# Altium PCB opo_v4.PcbDoc (part 1 of 2)
Units mil, origin at the board's own origin, x right, y up, seen from the top; angles counter-clockwise.
Board outline 1250 x 1250 mil, 6 copper layers (Top Layer, GND, Mid-Layer 3, Mid-Layer 4, VCC, Bottom Layer), stack 72.01 mil thick; 106 components, 83 nets, 447 pads, 226 vias.
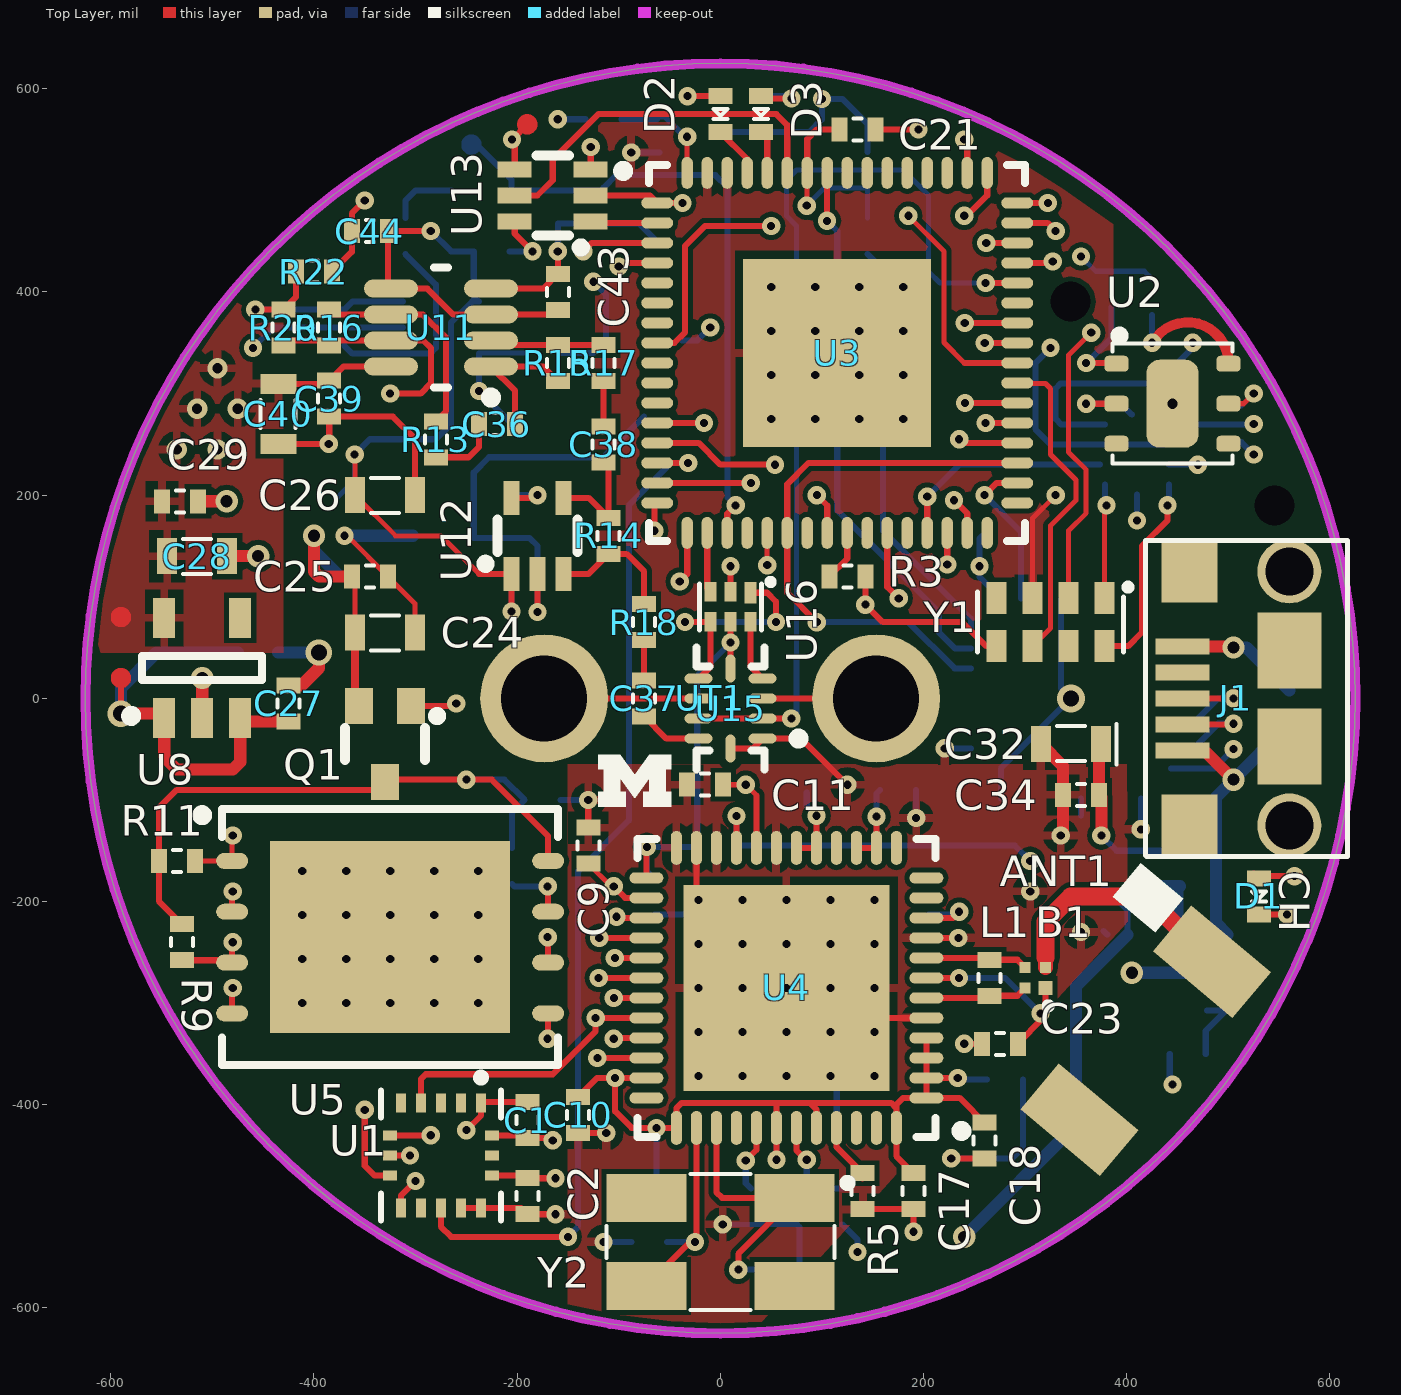
[diagram p0: Top Layer view]
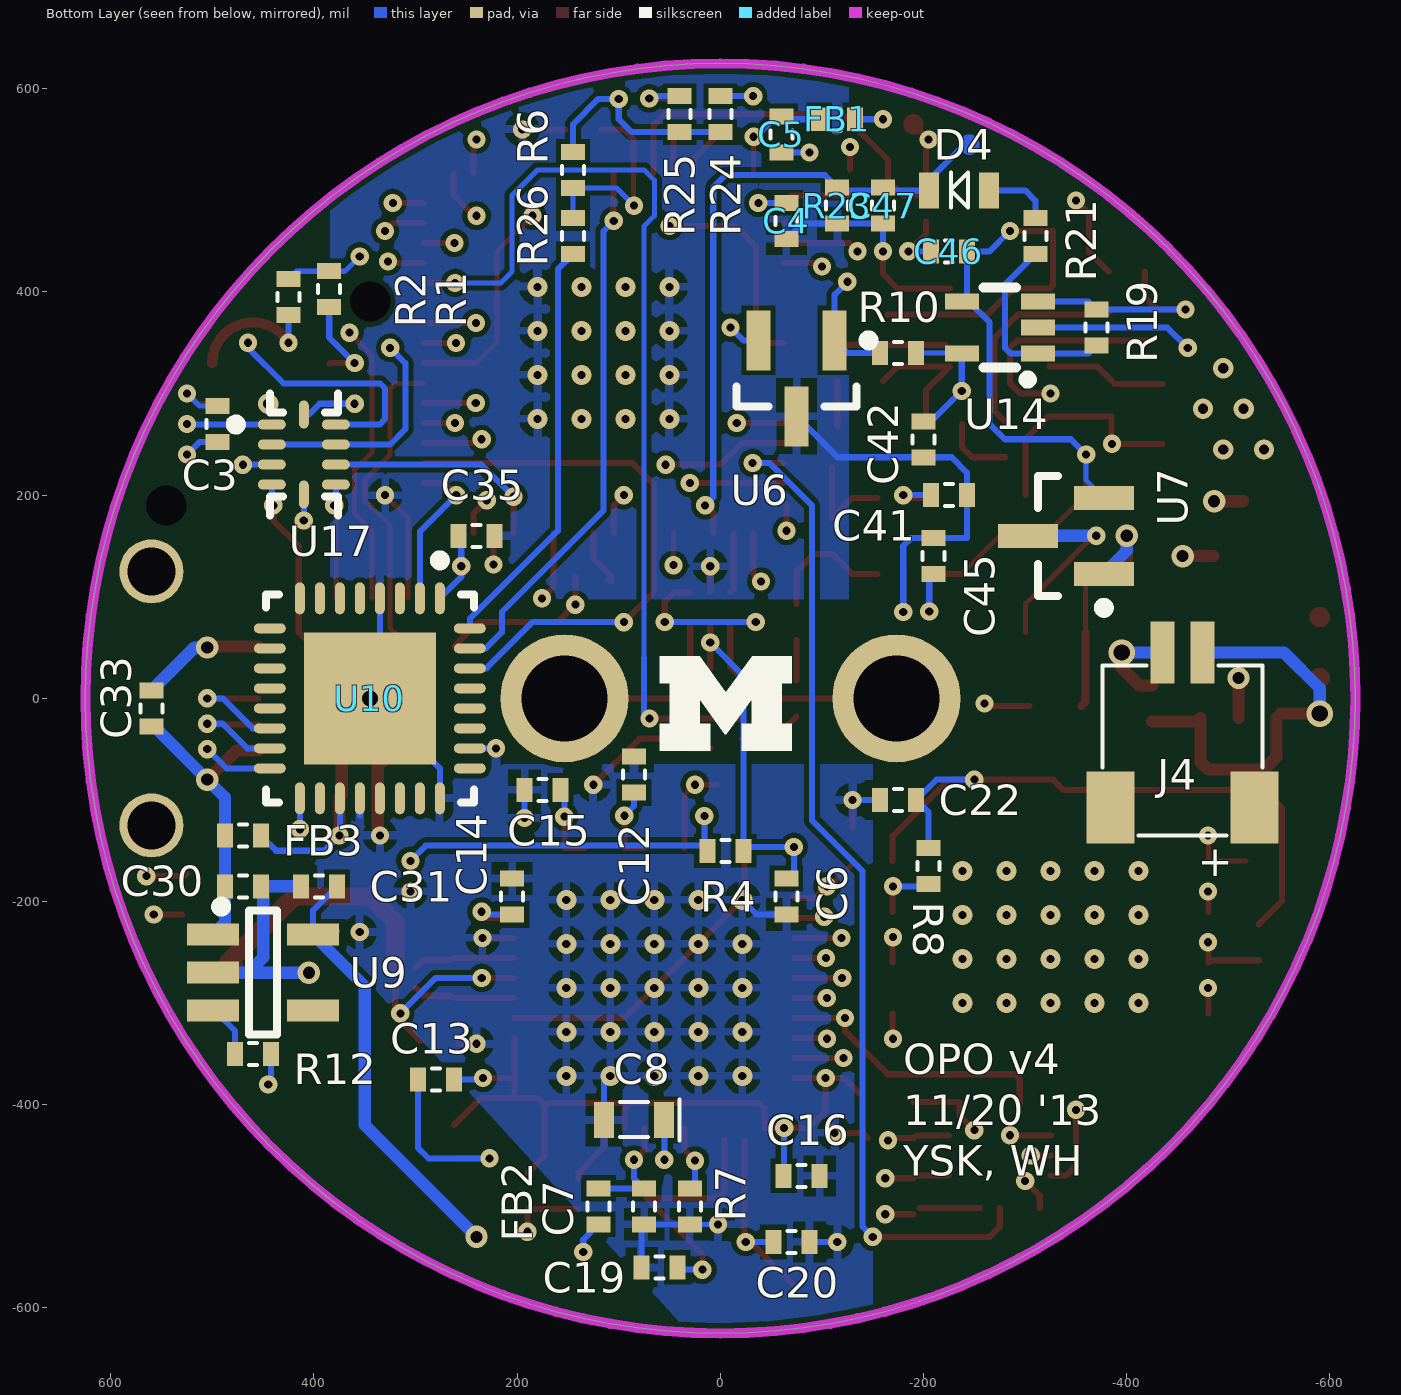
[diagram p1: Bottom Layer view, seen from below]
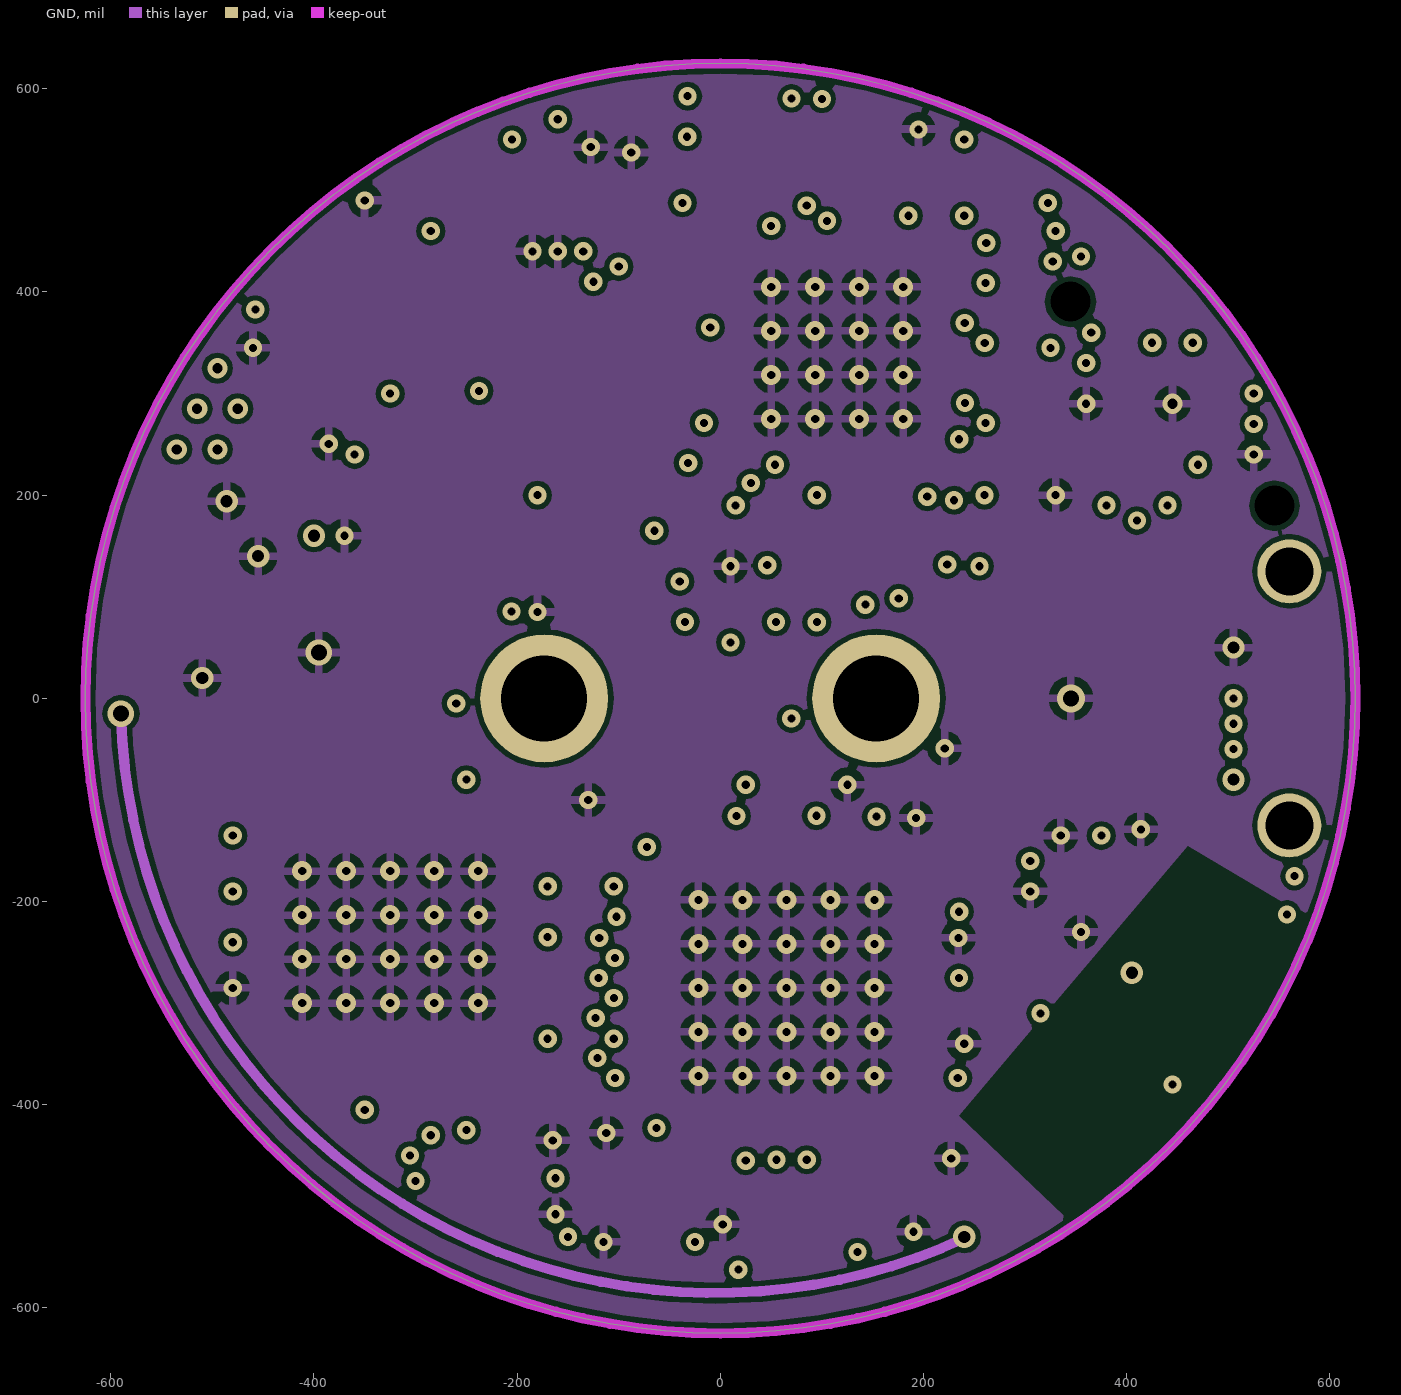
[diagram p2: GND]
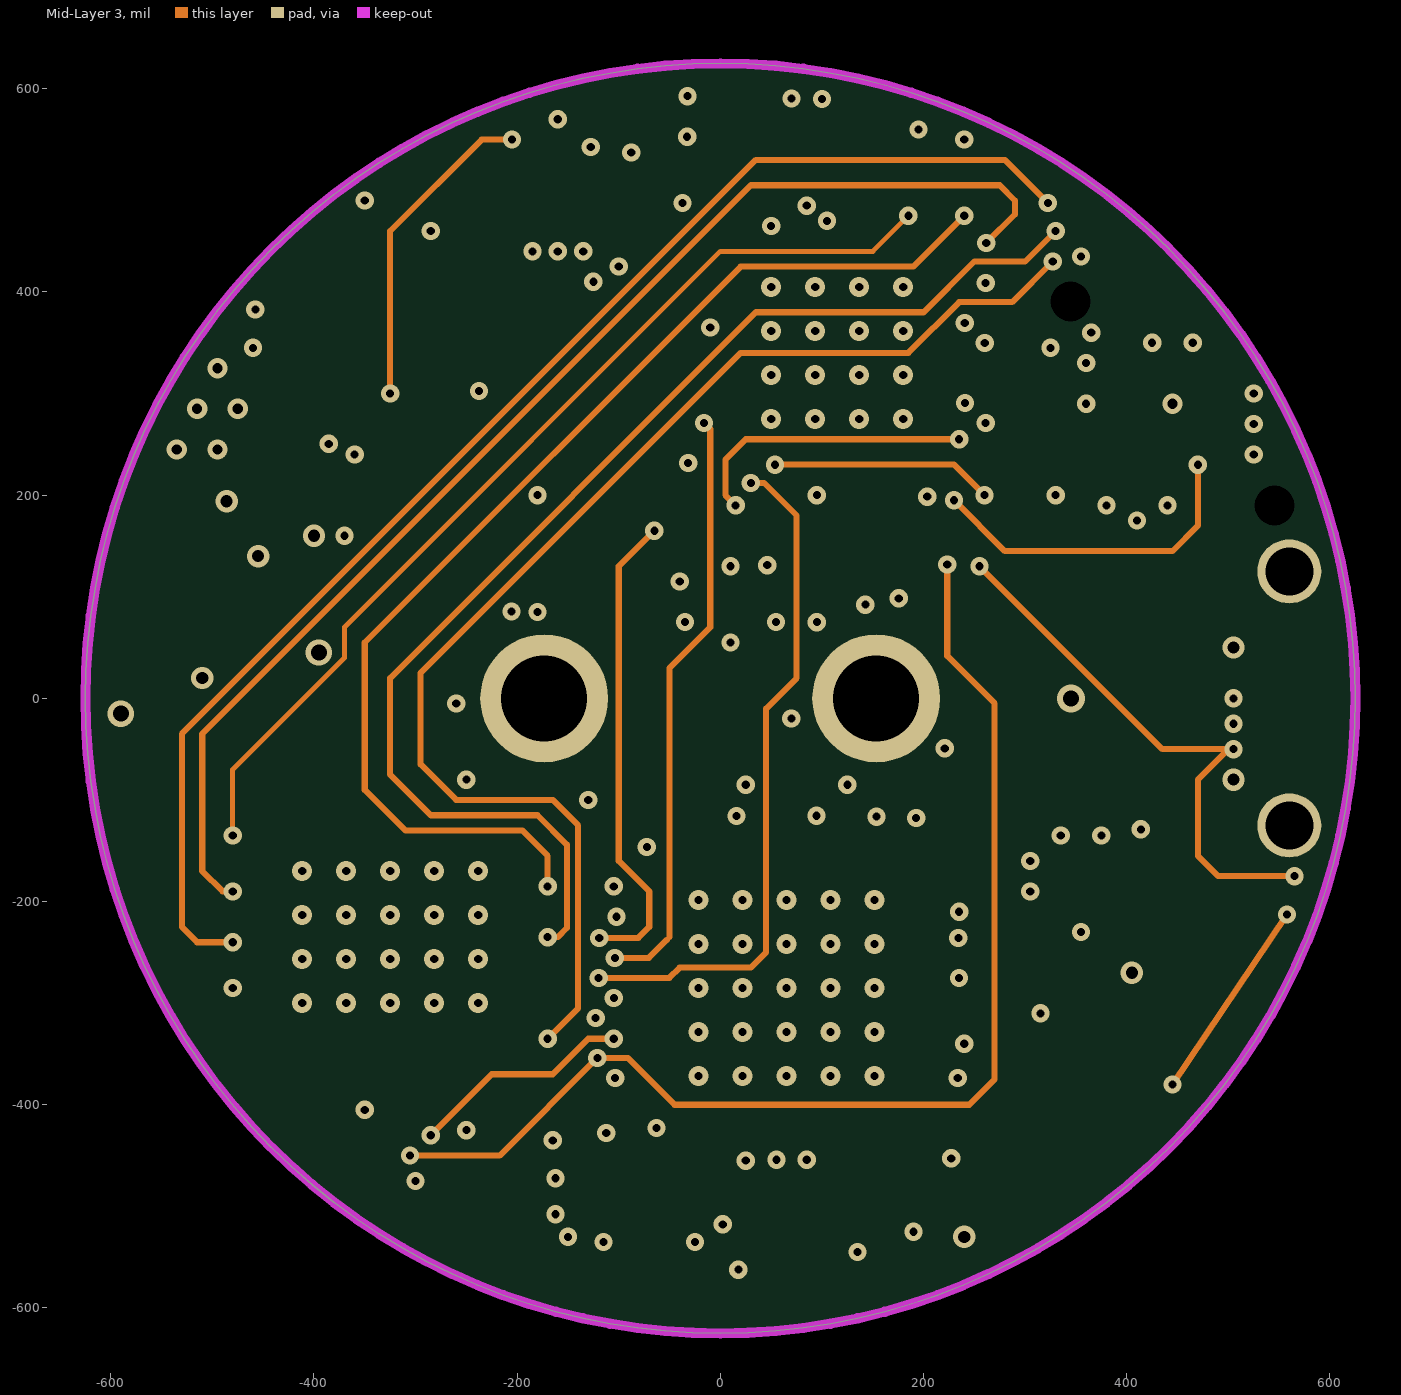
[diagram p3: Mid-Layer 3]
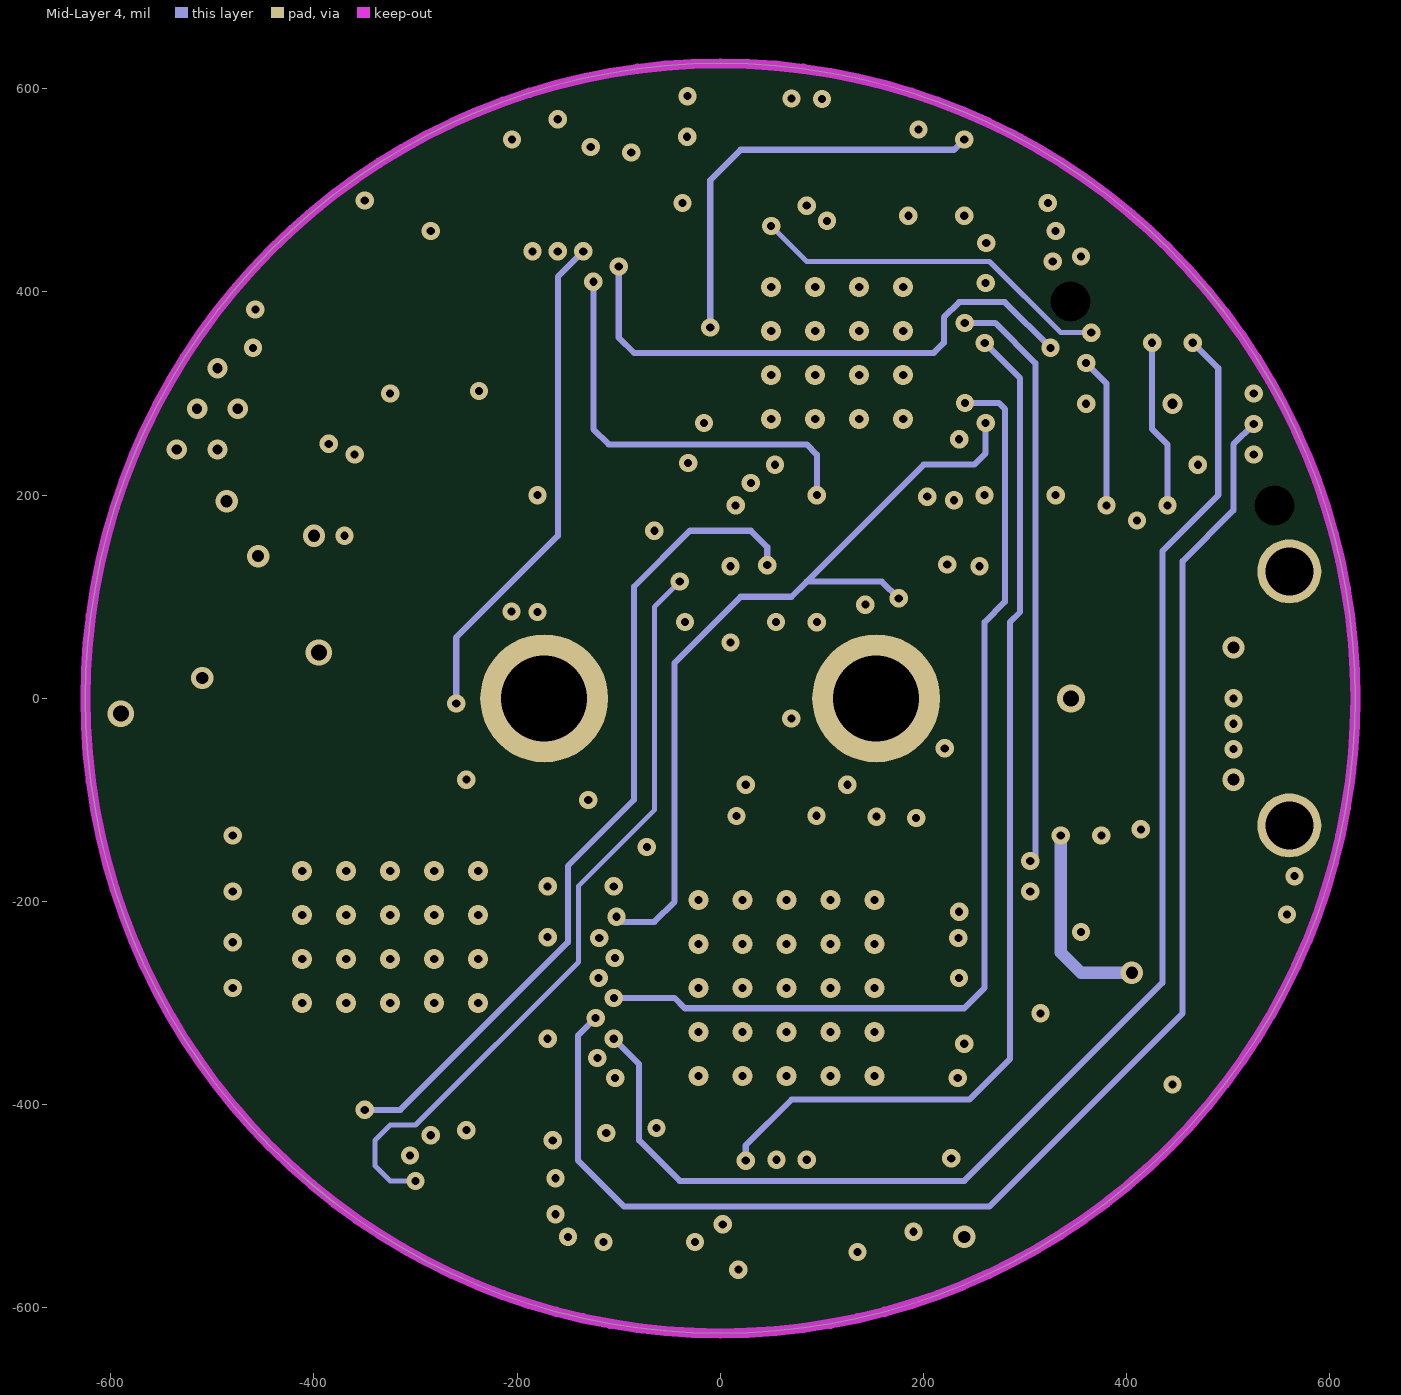
[diagram p4: Mid-Layer 4]
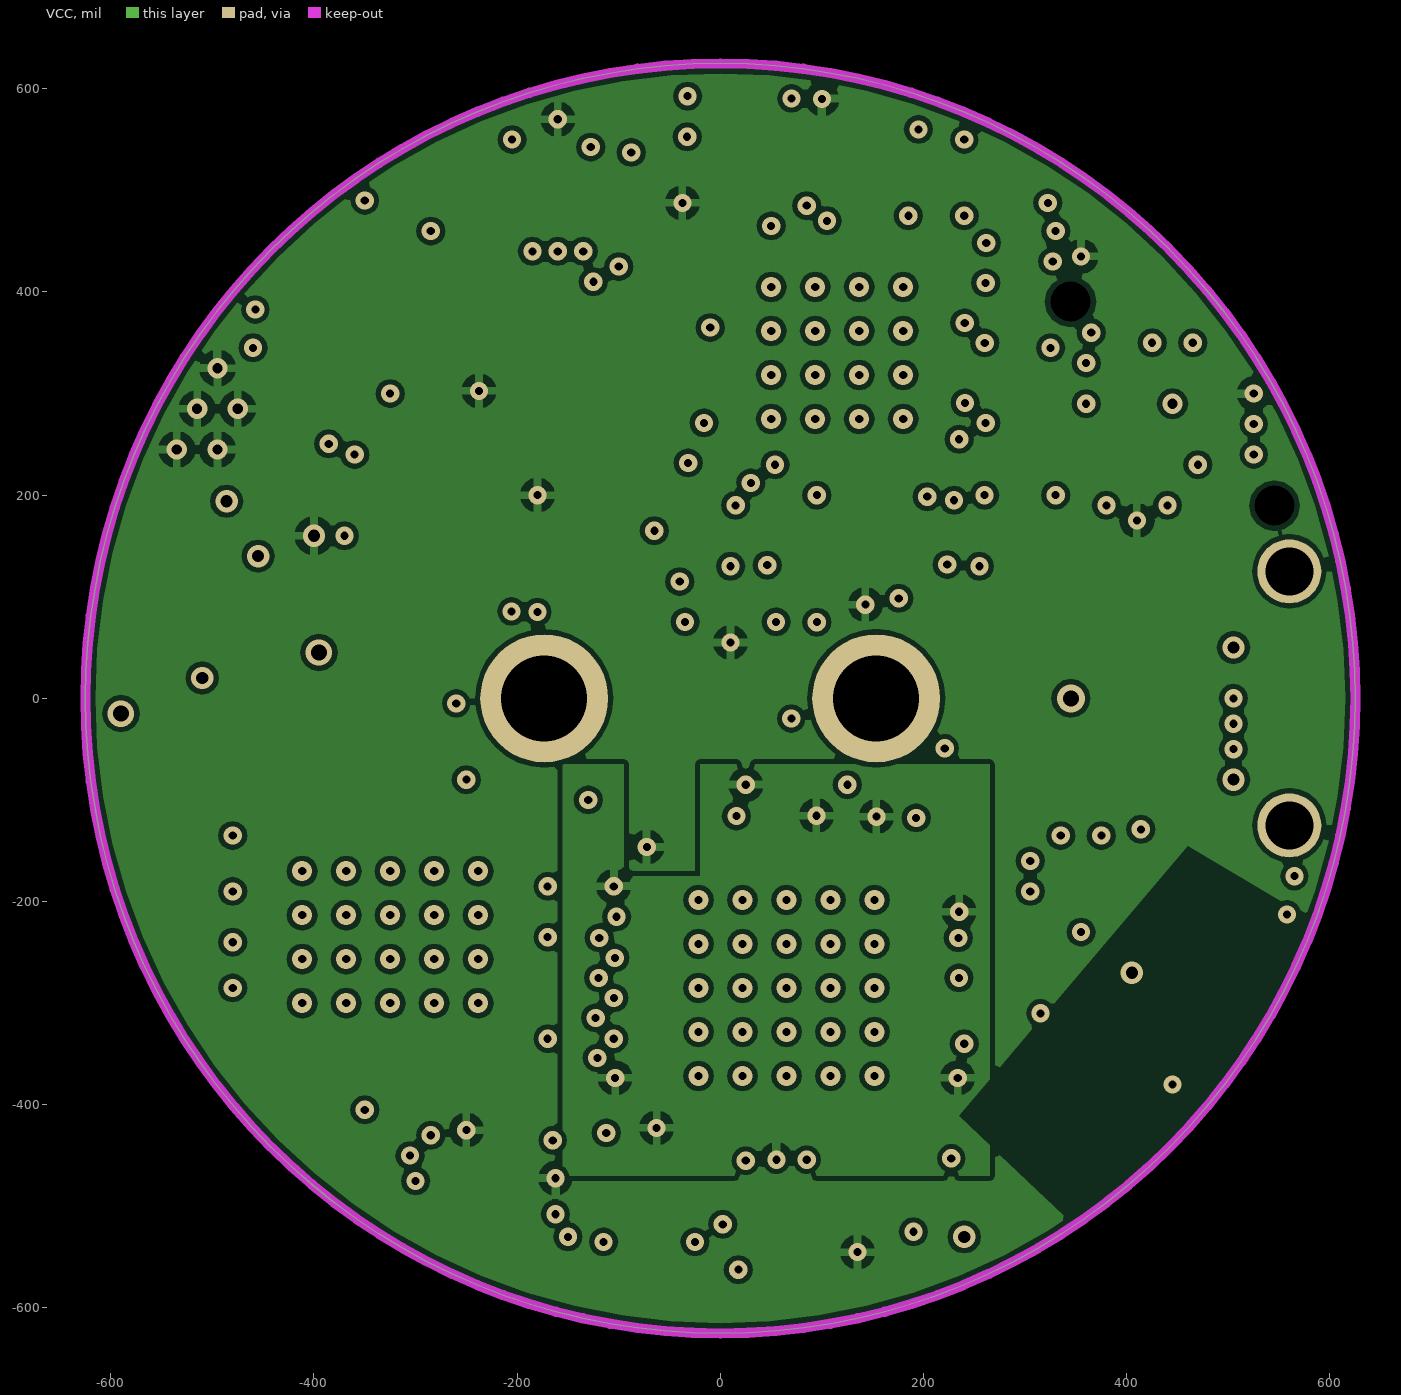
[diagram p5: VCC]

## Layer stack, top to bottom
Top Solder: solder mask 0.4, Solder Resist, Dk 3.5
Top Layer: signal copper 1.4
Dielectric1: core 11.87, FR-4, Dk 4.8
GND: signal copper 1.4
Dielectric2: prepreg 14, FR-4, Dk 4.8
Mid-Layer 3: signal copper 1.4
Dielectric4: core 11.87, FR-4, Dk 4.8
Mid-Layer 4: signal copper 1.4
Dielectric5: prepreg 14, FR-4, Dk 4.8
VCC: signal copper 1.4
Dielectric3: core 11.87, FR-4, Dk 4.8
Bottom Layer: signal copper 1.4
Bottom Solder: solder mask 0.4, Solder Resist, Dk 3.5

## Board outline
-625,0 ccw(c0,0) 0,-625 ccw(c0,0) 625,0 ccw(c0,0) 0,625 ccw(c0,0)

## Design rules (kind name [scope] priority, off if disabled: settings)
Clearance "Clearance~Sunstone Circuits" [All] p1: gap=5 // Sunstone Circuits Minimum Clearance Rule (MLB~4&6 Layer Designs)
HoleSize "HoleSize~Sunstone Circuits" [All] p1: absolutevalues=TRUE maxlimit=251 minlimit=8 maxpercent=80.000 minpercent=20.000 // Sunstone Circuits Hole Size Rule (MLB~4&6 Layer Designs)
HoleSize Testpoint [All] p2: absolutevalues=TRUE maxlimit=100 minlimit=1 maxpercent=80.000 minpercent=20.000
HoleSize TestPointUsage [All] p3: absolutevalues=TRUE maxlimit=100 minlimit=1 maxpercent=80.000 minpercent=20.000
MinimumAnnularRing "MinimumAnnularRing~Sunstone Circuits" [All] p1: minimumring=5 // Sunstone Circuits Minimum Annular Ring (MLB~4&6 Layer Designs)
MinimumSolderMaskSliver [All] p1 off: minsoldermaskwidth=10
PlaneClearance "PlaneClearance~Sunstone Circuits" [All] p1: clearance=5 // Sunstone Circuits Power Plane Clearance Rule (MLB~4&6 Layer Designs)
PlaneConnect "PlaneConnect~Sunstone Circuits" [All] p1: planeconnectstyle=Relief reliefexpansion=12 reliefentries=4 reliefconductorwidth=8 reliefairgap=12 // Sunstone Circuits Power Plane Connect Rule (MLB~4&6 Layer Designs)
PolygonConnect "PolygonConnect~Sunstone Circuits" [All] p1: connectstyle=Relief reliefconductorwidth=8 reliefentries=4 polygonreliefangle="90 Angle" airgapwidth=8 // Sunstone Circuits Polygon Connect Style (MLB~4&6 Layer Designs)
RoomDefinition U_ultrasonic_tx [InComponentClass('U_ultrasonic_tx')] p1 off: confinementstyle=ConfineIn formatcopy=TRUE lockcomponents=FALSE outline -273.88,-265.4 -273.88,265.41 255.91,265.41 255.91,-265.4
RoomDefinition U_ultrasonic_rx [InComponentClass('U_ultrasonic_rx')] p2 off: confinementstyle=ConfineIn formatcopy=TRUE lockcomponents=FALSE outline -469.61,223.74 -469.61,336.26 -458.7,336.26 -458.7,407.48 -442.48,407.48 -442.48,448.7 -387.48,448.7 -387.48,488.7 -338.7,488.7 -338.7,497.48 -291.26,497.48 -291.26,534.61 -236.02,534.61 -236.02,551.26 -93.98,551.26 -93.98,527.48 -86.3,527.48 -86.3,202.48 -81.3,202.48 -81.3,117.48 -46.3,117.48 -46.3,-42.48 -103.7,-42.48 -103.7,88.98 -250.12,88.98 -250.12,171.3 -267.48,171.3 -267.48,212.52 -308.7,212.52 -308.7,223.74
RoomDefinition U_programming [InComponentClass('U_programming')] p3 off: confinementstyle=ConfineIn formatcopy=TRUE lockcomponents=FALSE outline 209.02,-135.98 209.02,155.67 395.41,155.67 395.41,171.42 619.23,171.42 619.23,-171.42 558.7,-171.42 558.7,-247.48 505.71,-247.48 505.71,-356.93 324.29,-356.93 324.29,-135.98
RoomDefinition U_power [InComponentClass('U_power')] p4 off: confinementstyle=ConfineIn formatcopy=TRUE lockcomponents=FALSE outline -609.81,-135.13 -609.81,125.13 -574.32,125.13 -574.32,222.7 -428.74,222.7 -428.74,240.87 -251.26,240.87 -251.26,69.29 -273.74,69.29 -273.74,30.39 -363.34,30.39 -363.34,-135.13
RoomDefinition U_impulse [InComponentClass('U_impulse')] p5 off: confinementstyle=ConfineIn formatcopy=TRUE lockcomponents=FALSE outline -547.48,-298.7 -547.48,-141.3 -496.57,-141.3 -496.57,-110.98 -386.26,-110.98 -386.26,26.02 -157.48,26.02 -157.48,608.7 -28.7,608.7 -28.7,617.48 68.7,617.48 68.7,588.7 177.48,588.7 177.48,552.76 327.76,552.76 327.76,410.87 438.74,410.87 438.74,313.7 477.48,313.7 477.48,-140.35 569.88,-140.35 569.88,-496.54 218.7,-496.54 218.7,-527.48 168.7,-527.48 168.7,-532.48 148.7,-532.48 148.7,-542.48 142.95,-542.48 142.95,-614.93 73.7,-614.93 73.7,-622.48 -73.7,-622.48 -73.7,-614.93 -125.2,-614.93 -125.2,-452.48 -168.7,-452.48 -168.7,-379.02 -496.57,-379.02 -496.57,-298.7
RoomDefinition U_accero_humid_rtc [InComponentClass('U_accero_humid_rtc')] p6 off: confinementstyle=ConfineIn formatcopy=TRUE lockcomponents=FALSE outline -347.06,-526.98 -347.06,-355.44 332.63,-355.44 332.63,464.35 437.37,464.35 437.37,306.02 514.93,306.02 514.93,267.48 558.7,267.48 558.7,182.52 514.93,182.52 514.93,149.13 514.93,-532.48 -161.3,-532.48 -218.7,-532.48 -218.7,-526.98
RoutingVias "RoutingVias~Sunstone Circuits" [All] p1: holewidth=8 width=30 viastyle="Through Hole" minholewidth=8 minwidth=18 maxholewidth=20 maxwidth=40 // Sunstone Circuits Routing Vias Rule (MLB~4&6 Layer Designs)
ShortCircuit "ShortCircuit~Sunstone Circuits" [All] p1: allowed=FALSE // Sunstone Circuits Short Circuit Rule~Do Not Allow (MLB~4&6 Layer Designs)
SilkToSilkClearance [All] p1 off: silktosilkclearance=10
SilkToSolderMaskClearance [IsPad] p1 off: minsilkscreentomaskgap=10 clearancetoexposedcopper=TRUE
SolderMaskExpansion "Tent Vias" [isVia] p1: expansion=-10
SolderMaskExpansion "SolderMaskExpansion~Sunstone Circuits" [All] p2: expansion=3 // Sunstone Circuits Solder Mask Expansion Rule (MLB~4&6 Layer Designs)
ViasUnderSMD "ViasUnderSMD~Sunstone Circuits" [All] p1: allowed=FALSE // Sunstone Circuits Vias Under SMD~Do Not Allow (MLB~4&6 Layer Designs)
Width "Width~Sunstone Circuits" [All] p1: maxlimit=100 minlimit=5 preferedwidth=6 // Sunstone Circuits Minimum Width Rule (MLB~4&6 Layer Designs)
22 further rules are at their usual default settings.

## Classes and differential pairs
component class U_accero_humid_rtc: C1 C2 C3 R1 R2 U1 U2 Y1
component class U_impulse: ANT1 B1 C4 C5 C6 C7 C8 C9 C10 C11 C12 C13 C14 C15 C16 C17 C18 C19 C20 C21 C22 C23 D2 D3 FB1 FB2 L1 Q1 R3 R4 R5 R6 R7 R8 R9 R10 R11 R24 R25 R26 U3 U4 U5 U6 U17 Y2
component class U_power: C24 C25 C26 C27 C28 C29 J4 U7 U8
component class U_programming: C30 C31 C32 C33 C34 C35 D1 FB3 J1 R12 U9 U10
component class U_ultrasonic_rx: C36 C37 C38 C39 C40 C41 C42 C43 C44 C45 C46 C47 D2 R13 R14 R15 R16 R17 R18 R19 R20 R21 R22 R23 U11 U12 U13 U14
component class U_ultrasonic_tx: U15 U16 UT1

## Components (designator, comment, footprint, x,y, rotation, side; value= is the part's Value field where it differs from the comment)
ANT1 "Ground Antenna" "CHIP ANTENNA" 435,-325 r230 top
B1 "BD2425N50200AHF" BD2425N50200AHF 310,-275 r90 top
C1 "Ceramic capacitor" 0402 -190,-415 r270 top
C2 "Ceramic capacitor" 0402 -190,-490 r270 top
C3 "Ceramic capacitor" 0402 495,270 r270 bottom
C4 "Ceramic capacitor" 0402 -65,470 r270 bottom
C5 "Ceramic capacitor" 0402 -60,555 r270 bottom
C6 "Ceramic capacitor" 0402 -65,-195 r270 bottom
C7 "Ceramic capacitor" 0402 75,-500 r270 bottom
C8 "Tantalum capacitor" "0603 - Polar Marking" 85,-415 r0 bottom
C9 "Ceramic capacitor" 0402 -130,-145 r90 top
C10 "Ceramic capacitor" 0402 -140,-410 r270 top
C11 "Ceramic capacitor" 0402 -15,-85 r180 top
C12 "Ceramic capacitor" 0402 85,-75 r90 bottom
C13 "Ceramic capacitor" 0402 280,-375 r0 bottom
C14 "Ceramic capacitor" 0402 205,-195 r90 bottom
C15 "Ceramic capacitor" 0402 175,-90 r0 bottom
C16 "Ceramic capacitor" 0402 -80,-470 r180 bottom
C17 "Ceramic capacitor" 0402 190,-485 r270 top
C18 "Ceramic capacitor" 0402 260,-435 r270 top
C19 "Ceramic capacitor" 0402 60,-560 r180 bottom
C20 "Ceramic capacitor" 0402 -70,-535 r0 bottom
C21 "Ceramic capacitor" 0402 135,560 r0 top
C22 "Ceramic capacitor" 0402 -175,-100 r0 bottom
C23 "Ceramic capacitor" 0402 275,-340 r180 top
C24 "Ceramic capacitor" 0603 -330,65 r0 top
C25 "Ceramic capacitor" 0402 -345,120 r0 top
C26 "Ceramic capacitor" 0603 -330,200 r0 top
C27 "Ceramic capacitor" 0402 -425,-5 r90 top
C28 "Ceramic capacitor" 0603 -515,140 r0 top
C29 "Ceramic capacitor" 0402 -531.84,194 r0 top
C30 "Ceramic capacitor" 0402 470,-185 r180 bottom
C31 "Ceramic capacitor" 0402 395,-185 r0 bottom
C32 "Tantalum capacitor" "0603 - Polar Marking" 345,-45 r180 top
C33 "Ceramic capacitor" 0402 560,-10 r90 bottom
C34 "Ceramic capacitor" 0402 355,-95 r180 top
C35 "Ceramic capacitor" 0402 240,160 r180 bottom
C36 "Ceramic capacitor" 0402 -220,270 r180 top
C37 "Ceramic capacitor" 0402 -75,0 r90 top
C38 "Ceramic capacitor" 0402 -115,250 r90 top
C39 "Ceramic capacitor" 0402 -385,295 r270 top
C40 "Ceramic capacitor" 0603 -435,280 r270 top
C41 "Ceramic capacitor" 0402 -225,200 r180 bottom
C42 "Ceramic capacitor" 0402 -200,255 r270 bottom
C43 "Ceramic capacitor" 0402 -160,400 r90 top
C44 "Ceramic capacitor" 0402 -345,460 r180 top
C45 "Ceramic capacitor" 0402 -210,140 r90 bottom
C46 "Ceramic capacitor" 0402 -225,440 r0 bottom
C47 "Ceramic capacitor" 0402 -160,485 r270 bottom
D1 "LED, Orange" "0402 - DIODE" 530,-195 r270 top
D2 "LED, Red" "0402 - DIODE" 0,575 r270 top
D3 "LED, Green" "0402 - DIODE" 40,575 r270 top
D4 "Schottky diode" "0603 - DIODE" -235,500 r0 bottom
FB1 "Ferrite Bead" 0402 -115,570 r0 bottom
FB2 "Ferrite Bead" 0402 120,-500 r90 bottom
FB3 "Ferrite Bead" 0402 470,-135 r0 bottom
J1 "micro USB-B" "MICRO USB-B" 560,0 r90 top
J4 "SM02B-SRSS-TB" "JST SH SERIES" -455,-135 r180 bottom
L1 "Chip inductor" 0402 265,-275 r270 top
Q1 "DMG1013UW" SC70-3 -330,-45 r180 top
R1 "Chip resistor" 0402 385,402.72 r270 bottom
R2 "Chip resistor" 0402 425,395 r270 bottom
R3 "Chip resistor" 0402 125,120 r180 top
R4 "Chip resistor" 0402 -5,-150 r180 bottom
R5 "Chip resistor" 0402 140,-485 r90 top
R6 "Chip resistor" 0402 145,520 r270 bottom
R7 "Chip resistor" 0402 30,-500 r270 bottom
R8 "Chip resistor" 0402 -205,-165 r90 bottom
R9 "Chip resistor" 0402 -530,-240 r90 top
R10 "Chip resistor" 0402 -175,340 r0 bottom
R11 "Chip resistor" 0402 -535,-160 r180 top
R12 "Chip resistor" 0402 460,-350 r0 bottom
R13 "Chip resistor" 0402 -280,255 r90 top
R14 "Chip resistor" 0402 -110,160 r90 top
R15 "Chip resistor" 0402 -160,330 r90 top
R16 "Chip resistor" 0402 -385,365 r90 top
R17 "Chip resistor" 0402 -115,330 r90 top
R18 "Chip resistor" 0402 -75,75 r90 top
R19 "Chip resistor" 0402 -370,365 r270 bottom
R20 "Chip resistor" 0402 -430,365 r90 top
R21 "Chip resistor" 0402 -310,455 r90 bottom
R22 "Chip resistor" 0402 -400,420 r0 top
R23 "Chip resistor" 0402 -115,485 r270 bottom
R24 "Chip resistor" 0402 0,575 r270 bottom
R25 "Chip resistor" 0402 40,575 r270 bottom
R26 "Chip resistor" 0402 145,455 r90 bottom
U1 "ADXL362" LGA_CC-16-4 -275,-450 r270 top
U2 "Humidity and Temperature Sensor IC" DFN6 445,290 r270 top
U3 "MSP430F1611" QFN50P900X900X90_HS-65N 115,340 r0 top
U4 "CC2420" QFN50P700X700X100_HS-49N 65,-285 r180 top
U5 "SST25VF064C" WSON -325,-235 r0 top
U6 "DS2411" SOT23-3N -75,315 r270 bottom
U7 "ISL60002" SOT23-3N -340,160 r0 bottom
U8 "ADP162" TSOT23-5 -510,30 r90 top
U9 "MAX1555" SOT23-5 450,-270 r180 bottom
U10 "FT232RQ" QFN-32 345,0 r270 bottom
U11 "MIC863" TSOP65P280X145-8N -275,365 r180 top
U12 "MIC861" SC70-5 -180,160 r0 top
U13 "ADG849" SC70-6 -165,495 r90 top
U14 "TS881" SC70-5 -275,365 r90 bottom
U15 "NX3L4684" QFN50P155X200X13-10N 10,-10 r180 top
U16 "NLX2G14" ULLGA6 10,90 r180 top
U17 "NX3L4684" QFN50P155X200X13-10N 410,240 r180 bottom
UT1 "400EP250" "TRANSDUCER RECEPTICLE" -10,0 r0 top
Y1 "RV-4162-C7" RV4162 325,75 r180 top
Y2 "TXC 7B" "TXC 7B" 0,-535 r180 top

## Footprints (in the part's own frame and the unit in brackets; to place one, negate y for a bottom-side part, rotate by r counter-clockwise, add the part's x,y. Pads: shape width x height; smd on the part's side, far side on the other; paste and mask are expansions set on the pad)
0402 [mm] "2-Leads, Body 1.00x0.50mm, IPC Medium Density"
  rect 0.4x0.6 smd: 1(-0.45,0) 2(0.45,0)
  silkscreen extent -0.1,-0.28 0.1,0.28, body extent -0.53,-0.28 0.53,0.27, height 0.4
"0402 - DIODE" [mm] "2-Leads, Body 1.00x0.50mm, IPC Medium Density"
  rect 0.4x0.6 smd: 1(-0.45,0) 2(0.45,0)
  silkscreen extent -0.13,-0.18 0.13,0.18, body extent -0.53,-0.28 0.53,0.27, height 0.4
0603 [mm] "2-Leads, Body 1.55x0.85mm, IPC Medium Density"
  rect 0.5x0.9 smd: 1(-0.75,0) 2(0.75,0)
  silkscreen extent -0.35,-0.45 0.35,0.43, body extent -0.75,-0.42 0.75,0.43, height 0.5
"0603 - DIODE" [mm] "2-Leads, Body 1.55x0.85mm, IPC Medium Density"
  rect 0.5x0.9 smd: 1(-0.75,0) 2(0.75,0)
  silkscreen extent -0.23,-0.45 0.2,0.43, body extent -0.75,-0.42 0.75,0.43, height 0.5
"0603 - Polar Marking" [mm] "2-Leads, Body 1.55x0.85mm, IPC Medium Density"
  rect 0.5x0.9 smd: 1(-0.75,0) 2(0.75,0)
  silkscreen extent -1.14,-0.51 0.35,0.51, body extent -0.75,-0.42 0.75,0.43, height 0.5
BD2425N50200AHF [mm] "BD2425N50200AHF"
  rect 0.36x0.36 smd: 1(-0.255,-0.255)
  rect 0.28x0.28 smd: 2(0.255,-0.255) 3(0.255,0.255) 4(-0.255,0.255)
  silkscreen extent -0.74,-0.36 -0.66,-0.29, body extent -0.5,-0.5 0.5,0.5, height 0.56
"CHIP ANTENNA" [mm] "FR05-S1-N-0-102"
  rect 1.5x2.6 smd: 1(-2.075,-0.125) ""(3.075,-0.125)
  silkscreen extent -2.82,-3.07 -1.72,-1.67, body extent -3.03,-1.63 3.98,1.38, height 2
DFN6 [mm]
  rrect50% 0.4x0.6 smd: 1(-1,-1.4) 2(0,-1.4) 3(1,-1.4) 4(1,1.4) 5(0,1.4) 6(-1,1.4)
  rrect50% 2.2x1.3 smd mask+0.1: 7(0,0)
  rect 0x0 hole 1: ""(-2.55,-2.55) ""(2.55,2.55)
  silkscreen extent -1.8,-1.5 1.5,1.5, body extent -1.5,-1.5 1.5,1.5, height 1.1
"JST SH SERIES" [mm] "JST SH series, 2 positions"
  rect 0.6x1.55 smd: 1(-0.5,4.575) 2(0.5,4.575)
  rect 1.2x1.8 smd: ""(-1.8,0.7) ""(1.8,0.7)
  silkscreen extent -2,0 2,4.25, body extent -2,0 2,4.25, height 2.95
LGA_CC-16-4 [mm]
  rect 0.475x0.25 smd: 1(-1.313,1) 2(-1.313,0.5) 3(-1.313,0) 4(-1.313,-0.5) 5(-1.313,-1) 9(1.313,-1) 10(1.313,-0.5) 11(1.313,0) 12(1.313,0.5) 13(1.313,1)
  rect 0.25x0.35 smd: 6(-0.5,-1.275) 7(0,-1.275) 8(0.5,-1.275) 14(0.5,1.275) 15(0,1.275) 16(-0.5,1.275)
  silkscreen extent -2.02,-1.5 1.63,1.5, body extent -1.63,-1.5 1.63,1.5, height 1.15
"MICRO USB-B" [mm]
  rect 0.4x1.35 smd mask+0.1: 1(-1.3,2.675) 2(-0.65,2.675) 3(0,2.675) 4(0.65,2.675) 5(1.3,2.675)
  rect 1.6x1.4 smd mask+0.1: 6(-3.2,2.5) 6(3.2,2.5)
  round 1.6 hole 1.2: 6(-3.175,0) 6(3.175,0)
  rect 1.9x1.6 smd mask+0.1: 6(-1.2,0) 6(1.2,0)
  silkscreen extent -3.95,-1.45 3.95,3.6
QFN50P155X200X13-10N [mm] "QFN, 10-Leads, Body 2.1x1.6mm (max), Pitch 0.50mm, IPC Medium Density"
  oval 0.7x0.25 smd: 1(-0.8,0.75) 2(-0.8,0.25) 3(-0.8,-0.25) 4(-0.8,-0.75) 6(0.8,-0.75) 7(0.8,-0.25) 8(0.8,0.25) 9(0.8,0.75)
  oval 0.25x0.7 smd: 5(0,-1) 10(0,1)
  silkscreen extent -1.83,-1.53 0.85,1.53, body extent -0.83,-1.05 0.82,1.05, height 0.13
QFN50P700X700X100_HS-49N [mm] "QFN, 48-Leads, Body 7.00x7.00mm, Pitch 0.50mm, Thermal Pad 5.15x5.15mm, IPC Medium Density"
  oval 0.85x0.28 smd mask+0.07: 1(-3.5,2.75) 2(-3.5,2.25) 3(-3.5,1.75) 4(-3.5,1.25) 5(-3.5,0.75) 6(-3.5,0.25) 7(-3.5,-0.25) 8(-3.5,-0.75) 9(-3.5,-1.25) 10(-3.5,-1.75) 11(-3.5,-2.25) 12(-3.5,-2.75) 25(3.5,-2.75) 26(3.5,-2.25) 27(3.5,-1.75) 28(3.5,-1.25) 29(3.5,-0.75) 30(3.5,-0.25) 31(3.5,0.25) 32(3.5,0.75) 33(3.5,1.25) 34(3.5,1.75) 35(3.5,2.25) 36(3.5,2.75)
  oval 0.28x0.85 smd mask+0.07: 13(-2.75,-3.5) 14(-2.25,-3.5) 15(-1.75,-3.5) 16(-1.25,-3.5) 17(-0.75,-3.5) 18(-0.25,-3.5) 19(0.25,-3.5) 20(0.75,-3.5) 21(1.25,-3.5) 22(1.75,-3.5) 23(2.25,-3.5) 24(2.75,-3.5) 37(2.75,3.5) 38(2.25,3.5) 39(1.75,3.5) 40(1.25,3.5) 41(0.75,3.5) 42(0.25,3.5) 43(-0.25,3.5) 44(-0.75,3.5) 45(-1.25,3.5) 46(-1.75,3.5) 47(-2.25,3.5) 48(-2.75,3.5)
  rect 5.15x5.15 smd: 49(0,0)
  silkscreen extent -4.5,-3.72 3.72,3.73, body extent -3.58,-3.57 3.57,3.58, height 1
QFN50P900X900X90_HS-65N [mm] "QFN, 64-Leads, Body 9.00x9.00mm, Pitch 0.50mm, Thermal Pad 4.70x4.70mm, IPC Medium Density"
  oval 0.8x0.28 smd mask+0.07: 1(-4.5,3.75) 2(-4.5,3.25) 3(-4.5,2.75) 4(-4.5,2.25) 5(-4.5,1.75) 6(-4.5,1.25) 7(-4.5,0.75) 8(-4.5,0.25) 9(-4.5,-0.25) 10(-4.5,-0.75) 11(-4.5,-1.25) 12(-4.5,-1.75) 13(-4.5,-2.25) 14(-4.5,-2.75) 15(-4.5,-3.25) 16(-4.5,-3.75) 33(4.5,-3.75) 34(4.5,-3.25) 35(4.5,-2.75) 36(4.5,-2.25) 37(4.5,-1.75) 38(4.5,-1.25) 39(4.5,-0.75) 40(4.5,-0.25) 41(4.5,0.25) 42(4.5,0.75) 43(4.5,1.25) 44(4.5,1.75) 45(4.5,2.25) 46(4.5,2.75) 47(4.5,3.25) 48(4.5,3.75)
  oval 0.28x0.8 smd mask+0.07: 17(-3.75,-4.5) 18(-3.25,-4.5) 19(-2.75,-4.5) 20(-2.25,-4.5) 21(-1.75,-4.5) 22(-1.25,-4.5) 23(-0.75,-4.5) 24(-0.25,-4.5) 25(0.25,-4.5) 26(0.75,-4.5) 27(1.25,-4.5) 28(1.75,-4.5) 29(2.25,-4.5) 30(2.75,-4.5) 31(3.25,-4.5) 32(3.75,-4.5) 49(3.75,4.5) 50(3.25,4.5) 51(2.75,4.5) 52(2.25,4.5) 53(1.75,4.5) 54(1.25,4.5) 55(0.75,4.5) 56(0.25,4.5) 57(-0.25,4.5) 58(-0.75,4.5) 59(-1.25,4.5) 60(-1.75,4.5) 61(-2.25,4.5) 62(-2.75,4.5) 63(-3.25,4.5) 64(-3.75,4.5)
  rect 4.7x4.7 smd: 65(0,0)
  silkscreen extent -5.47,-4.7 4.7,4.7, body extent -4.55,-4.55 4.55,4.55, height 0.9
QFN-32 [mm] "32-Pin QFN 0.5 mm Pitch"
  oval 0.8x0.25 smd: 1(-2.5,1.75) 2(-2.5,1.25) 3(-2.5,0.75) 4(-2.5,0.25) 5(-2.5,-0.25) 6(-2.5,-0.75) 7(-2.5,-1.25) 8(-2.5,-1.75) 17(2.5,-1.75) 18(2.5,-1.25) 19(2.5,-0.75) 20(2.5,-0.25) 21(2.5,0.25) 22(2.5,0.75) 23(2.5,1.25) 24(2.5,1.75)
  oval 0.25x0.8 smd: 9(-1.75,-2.5) 10(-1.25,-2.5) 11(-0.75,-2.5) 12(-0.25,-2.5) 13(0.25,-2.5) 14(0.75,-2.5) 15(1.25,-2.5) 16(1.75,-2.5) 25(1.75,2.5) 26(1.25,2.5) 27(0.75,2.5) 28(0.25,2.5) 29(-0.25,2.5) 30(-0.75,2.5) 31(-1.25,2.5) 32(-1.75,2.5)
  rect 3.3x3.3 smd: 33(0,0)
  silkscreen extent -3.57,-2.6 2.6,2.6, body extent -2.58,-2.58 2.58,2.58, height 0.8
RV4162 [mm] "RTC"
  rect 0.5x0.8 smd: 1(-1.35,-0.6) 2(-0.45,-0.6) 3(0.45,-0.6) 4(1.35,-0.6) 5(1.35,0.6) 6(0.45,0.6) 7(-0.45,0.6) 8(-1.35,0.6)
  silkscreen extent -1.97,-0.91 1.83,0.75, body extent -1.6,-0.75 1.6,0.75, height 0.8
SC70-3 [mm]
  rect 0.7x0.9 smd: 1(-0.65,-0.95) 2(0.65,-0.95) 3(0,0.95)
  silkscreen extent -1.4,-0.8 1,0.4, body extent -0.9,-0.6 0.9,0.6, height 0.8
SC70-5 [mm]
  rect 0.4x0.85 smd: 1(-0.65,-0.95) 2(0,-0.95) 3(0.65,-0.95) 4(0.65,0.95) 5(-0.65,0.95)
  silkscreen extent -1.4,-0.8 1,0.4, body extent -0.9,-0.6 0.9,0.6, height 0.8
SC70-6 [mm]
  rect 0.4x0.85 smd: 1(-0.65,-0.95) 2(0,-0.95) 3(0.65,-0.95) 4(0.65,0.95) 5(0,0.95) 6(-0.65,0.95)
  silkscreen extent -1.4,-0.8 1,0.4, body extent -0.9,-0.6 0.9,0.6, height 0.8
SOT23-3N [mm] "SOT23, 3-Leads, Body 2.9x1.3mm, Pitch 0.95mm, Lead Span 2.5mm, IPC Medium Density"
  rect 1.5x0.6 smd: 1(-0.95,0.95) 2(-0.95,-0.95) 3(0.95,0)
  silkscreen extent -1.07,-1.5 0.7,1.92, body extent -0.7,-1.5 0.7,1.5, height 1.1
SOT23-5 [mm] "SOT23, 5-Leads, Body 2.9x1.6mm, Pitch 0.95mm, Lead Span 2.8mm, IPC High Density"
  rect 1.3x0.55 smd: 1(-1.25,0.95) 2(-1.25,0) 3(-1.25,-0.95) 4(1.25,-0.95) 5(1.25,0.95)
  silkscreen extent -1.18,-1.55 0.35,1.77, body extent -0.67,-1.5 0.65,1.5, height 1.45
"TRANSDUCER RECEPTICLE" [mm] "Transducer with Pin Recepticle"
  round 3.2 hole 2.15: 1(-4.15,0) 2(4.15,0)
  body extent -6.45,-6.49 6.5,6.49, height 14
TSOP65P280X145-8N [mm] "TSOP, 8-Leads, Body 2.90x1.60mm, Pitch 0.65mm, IPC Medium Density"
  oval 1.35x0.45 smd: 1(-1.25,0.975) 2(-1.25,0.325) 3(-1.25,-0.325) 4(-1.25,-0.975) 5(1.25,-0.975) 6(1.25,-0.325) 7(1.25,0.325) 8(1.25,0.975)
  silkscreen extent -1.38,-1.5 0.18,1.87, body extent -0.85,-1.5 0.85,1.5, height 1.45
TSOT23-5 [mm] "SOT23, 6-Leads, Body 3.0x2.9mm (max), Pitch 0.95mm, IPC Medium Density"
  rect 1x0.55 smd: 1(-1.25,0.95) 2(-1.25,0) 3(-1.25,-0.95) 4(1.25,-0.95) 5(1.25,0.95)
  silkscreen extent -1.32,-1.5 0.3,1.9, body extent -0.87,-1.5 0.87,1.5, height 1
"TXC 7B" [mm] "TXC 7B series"
  rect 2x1.2 smd: 1(-1.85,-1.1) 2(1.85,-1.1) 3(1.85,1.1) 4(-1.85,1.1)
  silkscreen extent -3.25,-1.7 2.85,1.7, body extent -2.5,-1.6 2.5,1.6, height 0.9
ULLGA6 [mm] "ULLGA6 1.45x1.0, 0.5P  CASE 613AF"
  rect 0.3x0.53 smd: 1(-0.5,-0.355)
  rect 0.3x0.49 smd: 2(0,-0.375) 3(0.5,-0.375) 4(0.5,0.375) 5(0,0.375) 6(-0.5,0.375)
  silkscreen extent -1.02,-0.65 0.77,0.58, body extent -0.72,-0.5 0.72,0.5, height 0.4
WSON [mm] "QFN, 8-Leads, Body 8.00x6.00mm, Pitch 1.27mm, Thermal Pad 6.00x4.80mm, IPC Medium Density"
  oval 0.8x0.4 smd: 1(-3.95,1.905) 2(-3.95,0.635) 3(-3.95,-0.635) 4(-3.95,-1.905) 5(3.95,-1.905) 6(3.95,-0.635) 7(3.95,0.635) 8(3.95,1.905)
  rect 6x4.8 smd: 9(0,0)
  silkscreen extent -4.82,-3.2 4.2,3.2, body extent -4.05,-3.05 4.05,3.05, height 0.8

## Part data
ANT1: "2.4GHz Surface Mount Device (SMD) On Ground Antenna, 50 Ohms"
B1: "Ultra Low Profile 0404 Balun   50? to 200? Balanced"
C1 C2 C3 C4 C5 C6 C7 C9 C10 C11 C12 C13 C14 C15 C16 C17 C18 C21 C22 C25 C33 C34 C35 C39 C41 C42 C43 C44 C45 C46: library part C_0.1u_0402_ceramic, "Ceramic capacitor, 0.1u, 0402 package"
C8: library part C_10u_0603_tantalum, "Tantalum capacitor, 10 uF, 0603 package"
C19 C20: library part C_30p_0402_ceramic, "Ceramic capacitor, 30 pF, 0402 package"
C23: library part C_12p_0402_ceramic, "Ceramic capacitor, 12 pF, 0402 package"
C24 C26 C28 C40: library part C_10u_0603_ceramic, "Ceramic capacitor, 10 uF, 0603 package"
C27 C29 C30 C31 C37: library part C_1u_0402_ceramic, "Ceramic capacitor, 1 uF, 0402 package"
C32: library part C_4.7u_0603_tantalum, "Tantalum capacitor, 4.7 uF, 0603 package"
C36 C38: library part C_47p_0402_ceramic, "Ceramic capacitor, 47 pF, 0402 package"
C47: library part C_1000p_0402_ceramic, "Ceramic capacitor, 1000 pF, 0402 package"
D1: library part D_LED_ORANGE_0402, "LED, Orange, 0402"
D2: library part D_LED_RED_0402, "LED, Red, 0402"
D3: library part D_LED_GREEN_0402, "LED, Green,  0402"
D4: library part D_SCHOTTKY_30V_0.1A_0603, "Schottky diode 30 V 0.1 A 0603"
FB1 FB2 FB3: library part FB_150mA_0402, "Ferrite Bead, 150 mA, 0402 package"
J1: library part "Micro USB", "CONN USB MICRO B RECPT SMT R/A"
J4: "CONN HEADER SH 2POS SIDE 1MM TIN"
L1: library part L_6.8n_0402, "Chip inductor, 6.8 nH, 0402 package"
Q1: "P-CHANNEL ENHANCEMENT MODE MOSFET"
R1 R2: library part R_10K_0402, "Chip resistor, 10K, 0402 package"
R3 R4 R6 R8 R9 R11 R13 R17 R18: library part R_100K_0402, "Chip resistor, 100K, 0402 package"
R5: library part R_43K_0402, "Chip resistor, 43K, 0402 package"
R7 R14 R15 R16: library part R_1M_0402, "Chip resistor, 1M, 0402 package"
R10: library part R_2.2K_0402, "Chip resistor, 2.2K, 0402 package"
R12: library part R_1K_0402, "Chip resistor, 1K, 0402 package"
R19: library part R_1.24M_0402, "Chip resistor, 1.24M, 0402 package"
R20: library part R_37.4K_0402, "Chip resistor, 37.4K, 0402 package"
R21: library part R_27K_0402, "Chip resistor, 27K, 0402 package"
R22: library part R_422K_0402, "Chip resistor, 422K, 0402 package"
R23: library part R_270K_0402, "Chip resistor, 270K, 0402 package"
R24 R25: library part R_470_0402, "Chip resistor, 470, 0402 package"
R26: library part R_0_0402, "Chip resistor, 0, 0402 package"
U1: "Micropower, 3-Axis, ±2 g/±4 g/±8 g  Digital Output MEMS Accelerometer"
U2: library part SHT25, "SHT25"
U3: "MIXED SIGNAL MICROCONTROLLER"
U4: "2.4 GHz IEEE 802.15.4 / ZigBee-ready RF Transceiver"
U5: "64 Mbit SPI Serial Dual I/O Flash"
U6: "Silicon Serial Number with VCC Input"
U7: "IC VREF SERIES PREC SOT-23-3"
U8: "Ultralow Quiescent Current,  150 mA, CMOS Linear Regulators"
U9: "3 Dual-Input USB/AC Adapter 1-Cell Li+  Battery Chargers"
U10: library part IC_FT232RQ, "FT232R USB UART"
U11: "Dual Ultra Low Power Op Amp in SOT23-8"
U12: "IC OPAMP 400KHZ 2.7V ULT LP SC70"
U13: "0.5 ? SPDT/2:1 Mux in SC70"
U14: "Rail-to-rail 1.1 V nanopower comparator"
U15 U17: "IC ANALOG SWITCH SPDT 10XQFN"
U16: "Dual Schmitt-Trigger  Inverter"
UT1: library part Tranducer, "Air Ultrasounic Ceramic Transducers"
Y1: "Real Time Clock Module with I2C Bus"
Y2: "5 x 3.2 mm SMD SEAM CRYSTAL 7B SERIES"

## Via types
v1: diameter 18, hole 8, Top Layer to Bottom Layer, 148 vias
v2: diameter 19.68, hole 8.07, Top Layer to Bottom Layer, 61 vias
v3: diameter 22, hole 12, Top Layer to Bottom Layer, 8 vias
v4: diameter 20, hole 10, Top Layer to Bottom Layer, 6 vias
v5: diameter 26, hole 16, Top Layer to Bottom Layer, 2 vias
v6: diameter 27.56, hole 15.75, Top Layer to Bottom Layer, tented top, 1 vias

## Nets (pads, with @x,y where several pads share a name; then routed paths per layer and width w, separated by ;. In a path a pad name is that pad's centre, name@x,y a point inside that pad or via, vN(x,y) a via of type N, cw(c..) or ccw(c..) an arc to the next point about the centre after c; other vN are vias at no path point)
ADC0: U3.59 U13.5 | length 364.6
  Top Layer w6: U13.5@-202.4,495 -180,495 -165,510 -165,530 -120,575 55,575 65.79,564.21 U3.59@65.79,517.17
AMP1_OUT: C38.1 R14.2 U12.4 | length 102.1
  Top Layer w6: U12.4@-154.41,197.4 -129.69,197.4 R14.2@-110,177.72 C38.1@-110,227.28
AMP2_OUT: C36.1 R15.1 U11.1 | length 138.1
  Top Layer w6: C36.1@-202.28,270 -202.28,303.11 U11.1@-225.79,326.61 -174.33,326.61 R15.1@-160,312.28
AMP3_OUT: R16.1 R20.1 U11.7 U13.4 | length 622.6
  Top Layer w6: R20.1@-425.08,352.2 U11.7@-324.21,352.2 -292.2,352.2 -285,345 -285,310 -295,300 v1(-325,300) ; U13.4@-202.4,520.59 -202.4,547.4 v1(-205,550) -190,565
  Top Layer w10: -185,565 ccw(c-190,565) -185,565
  Mid-Layer 3 w6: v1(-325,300) -325,460 -235,550 v1(-205,550)
COMP_OUT: R19.2 R21.1 U14.1 | length 200.3
  Bottom Layer w6: R19.2@-370,347.28 -362.13,339.41 U14.1@-312.4,339.41 -285.59,339.41 -280,345 -280,407.28 R21.1@-310,437.28
DS2411_EN: U3.50 U6.2 | length 478.4
  Top Layer w6: v1(240,550) 242.95,547.05 U3.50@242.95,517.17
  Mid-Layer 4 w6: v1(-10,365) -10,510 20,540 230,540 v1(240,550)
  Bottom Layer w6: U6.2@-37.6,352.4 -22.6,352.4 v1(-10,365)
F\L\A\S\H\_\H\O\L\D\: R8.1 U3.49 U5.7 | length 1260.1
  Top Layer w6: v1(-170,-185) -169.49,-185.51 U5.7@-169.49,-210 ; v1(240,475) 242.64,475 262.64,495 U3.49@262.64,517.17
  Mid-Layer 3 w6: v1(-170,-185) -170,-155 -195,-130 -310,-130 -350,-90 -350,55 20,425 190,425 v1(240,475)
  Bottom Layer w6: R8.1@-205,-182.72 -202.72,-185 v1(-170,-185)
F\L\A\S\H\_\W\P\: R9.1 U3.48 U5.3 | length 1451
  Top Layer w6: R9.1@-530,-257.72 -482.8,-257.72 U5.3@-480.51,-260 -480.51,-240.51 v1(-480,-240) ; U3.48@292.17,487.64 v1(322.36,487.64)
  Mid-Layer 3 w6: v1(-480,-240) -515,-240 -530,-225 -530,-35 35,530 280,530 v1(322.36,487.64)
F\L\A\S\H\_C\S\: R11.1 U3.40 U5.1 | length 1255
  Top Layer w5: R11.1@-517.28,-160 U5.1@-480.51,-160 -480.51,-135.51 v1(-480,-135) ; v1(185,475) 220,440 220,350.32 240.16,330.16
  Top Layer w6: 240.16,330.16 U3.40@292.17,330.16
  Mid-Layer 3 w5: v1(-480,-135) -480,-70 -370,40 -370,70 0,440 150,440 v1(185,475)
FLASH_PWR_GATE: Q1.1 U3.3 | length 618.5
  Top Layer w6: Q1.1@-304.41,-7.6 -262.6,-7.6 v1(-260,-5) ; v1(-135,440) -126.73,448.27 U3.3@-62.17,448.27
  Mid-Layer 4 w6: v1(-260,-5) -260,60 -160,160 -160,415 v1(-135,440)